# EAGLE board tenacitas (EAGLE 7.2.0)
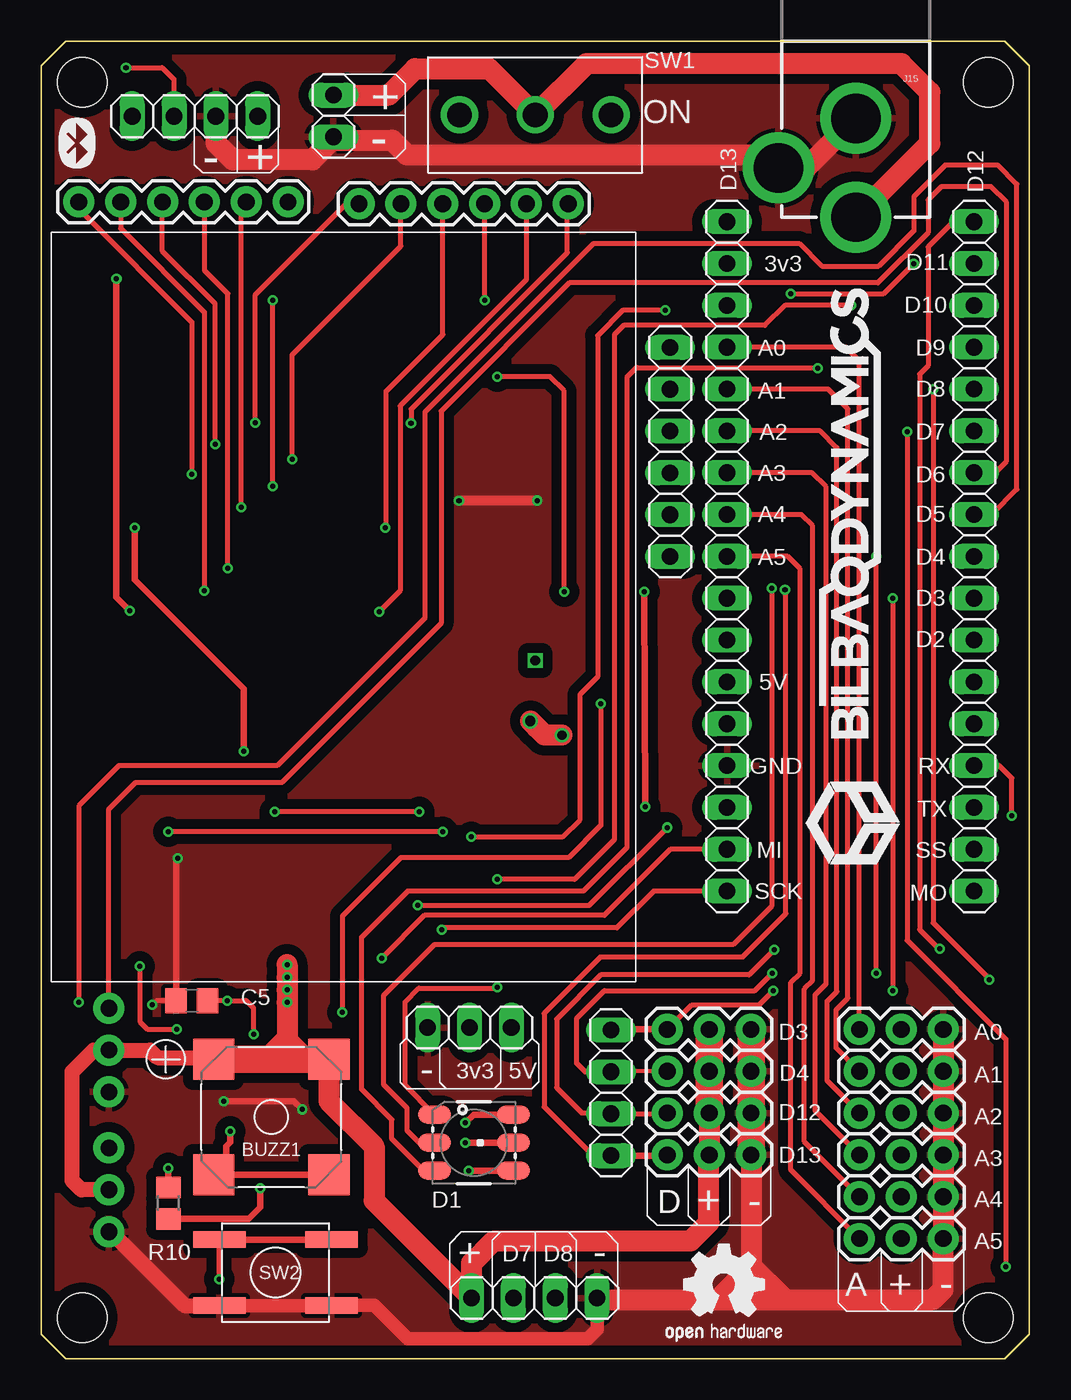
[diagram p0: board, top side]
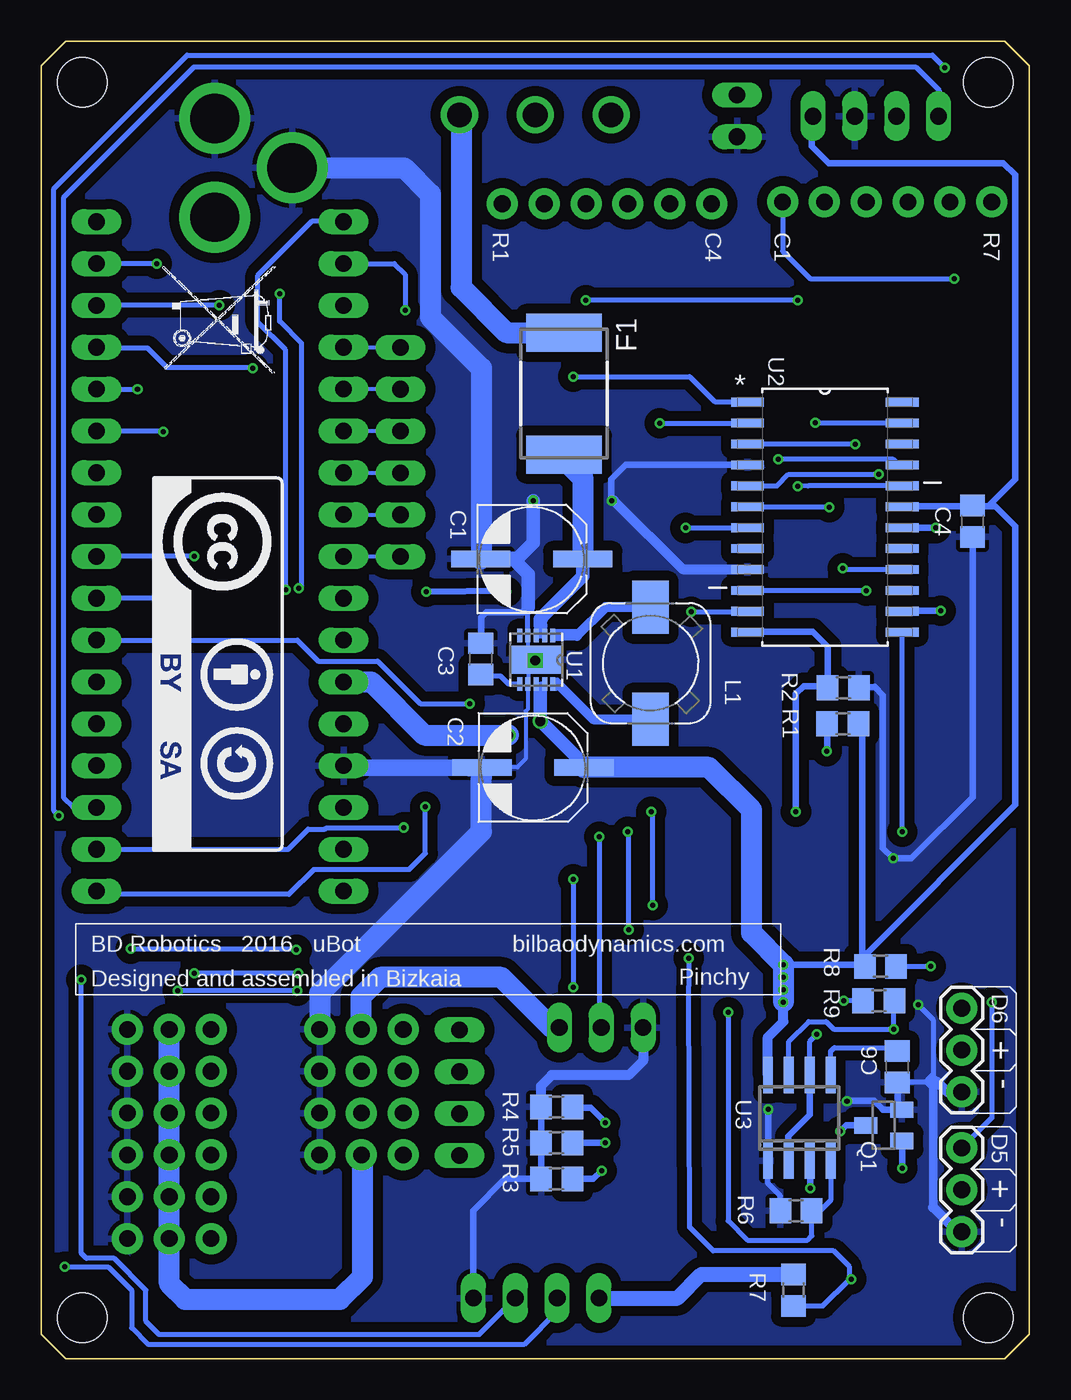
[diagram p1: board, bottom side, seen from below]

Size 60 x 80 mm. Coordinates in mm from the lower left corner, seen from the top.
Outline: 58.5,0 1.5,0 0,1.5 0,78.5 1.5,80 58.5,80 60,78.5 60,1.5 58.5,0
Copper layers (1*16): Top 0.035mm / dielectric 1.5mm / Bottom 0.035mm
Design rules "EagleRules": minimum track width 7mil, minimum drill 12mil, track to track 7mil, track to pad 7mil, pad to pad 7mil, via to via 7mil, smd to smd 0mil, copper to edge 20mil, drill to drill 10mil, minimum pad ring 10mil, minimum via ring 6mil, stop-mask expansion 2mil, vias tented up to drill 25mil, thermal gap 10mil
Holes 3 mm at 2.5,2.5 2.5,77.5 57.5,77.5 57.5,2.5

## Footprints (pad centres in the part's own frame; a part is rotated, then mirrored left to right if it is on the bottom)
KSSG74B16 = smd 2.5 x 2.5: P$1 3.5,3.5; P$2 3.5,-3.5; P$3 -3.5,-3.5; P$4 -3.5,3.5
EDK107M016A9G = smd 3.6 x 1: 1 3.1,0; 2 -3.1,0
C0805 = smd 1.3 x 1.5: 1 -0.95,0; 2 0.95,0
LED-TRICOLOR-5050 = smd 2 x 1.1: 1 -2.4,1.7; 2 -2.4,0; 3 -2.4,-1.7; 4 2.4,-1.7; 5 2.4,0; 6 2.4,1.7
SMD050F = smd 2.3 x 4.6: 1 -3.7,0; 2 3.7,0
1X03 = drill 1.016 pad 1.88: 1 0,0; 2 2.54,0; 3 5.08,0
1X04 = drill 1.016 long: 1 -3.81,0; 2 -1.27,0; 3 1.27,0; 4 3.81,0
POWER_JACK_PTH = drill 2.997 pad 4.318: GND 0,7.7; GNDBREAK 4.7,10.7; PWR 0,13.7
1X06 = drill 1.016 pad 1.88: 1 0,0; 2 2.54,0; 3 5.08,0; 4 7.62,0; 5 10.16,0; 6 12.7,0
1X06' = drill 1.016 long: 1 -6.35,0; 2 -3.81,0; 3 -1.27,0; 4 1.27,0; 5 3.81,0; 6 6.35,0
1X03' = drill 1.016 long: 1 -2.54,0; 2 0,0; 3 2.54,0
1X17 = drill 1.016 long: 1 -20.32,0; 2 -17.78,0; 3 -15.24,0; 4 -12.7,0; 5 -10.16,0; 6 -7.62,0; 7 -5.08,0; 8 -2.54,0; 9 0,0; 10 2.54,0; 11 5.08,0; 12 7.62,0; 13 10.16,0; 14 12.7,0; 15 15.24,0; 16 17.78,0; 17 20.32,0
1X02 = drill 1.016 long: 1 -1.27,0; 2 1.27,0
MCSDRH73B = smd 3.2 x 2.2: 1 -3.4,0; 2 3.4,0
SOT23 = smd 1 x 1.4: 1 -0.95,-1.1; 2 0.95,-1.1; 3 0,1.1
R0805 = smd 1.3 x 1.5: 1 -0.95,0; 2 0.95,0
MFP106D = drill 1.5: 1 -4.6,0; 2 4.6,0; COM 0,0
JAEGGER_MKII_EVQQ2 = smd 3.2 x 1: P$1 -3.4,2; P$2 -3.4,-2; P$3 3.4,-2; P$4 3.4,2
SON50P300X300X80-11N = smd 0.813 x 0.305: 1 -1.473,0.991; 2 -1.473,0.508; 3 -1.473,0; 4 -1.473,-0.508; 5 -1.473,-0.991; 6 1.473,-0.991; 7 1.473,-0.508; 8 1.473,0; 9 1.473,0.508; 10 1.473,0.991 | smd 1.702 x 3.15: 11 0,0
SOIC127P1032X265-24N = smd 1.981 x 0.533: 1 -4.699,6.985; 2 -4.699,5.715; 3 -4.699,4.445; 4 -4.699,3.175; 5 -4.699,1.905; 6 -4.699,0.635; 7 -4.699,-0.635; 8 -4.699,-1.905; 9 -4.699,-3.175; 10 -4.699,-4.445; 11 -4.699,-5.715; 12 -4.699,-6.985; 13 4.699,-6.985; 14 4.699,-5.715; 15 4.699,-4.445; 16 4.699,-3.175; 17 4.699,-1.905; 18 4.699,-0.635; 19 4.699,0.635; 20 4.699,1.905; 21 4.699,3.175; 22 4.699,4.445; 23 4.699,5.715; 24 4.699,6.985
SO08 = smd 0.6 x 2.2: 1 -1.905,-2.6; 2 -0.635,-2.6; 3 0.635,-2.6; 4 1.905,-2.6; 5 1.905,2.6; 6 0.635,2.6; 7 -0.635,2.6; 8 -1.905,2.6

## Placement (x,y rotation side)
BUZZ1  KSSG74B16  [KSSG74B16]  13.97,14.68 180 top
C1  100uF  [EDK107M016A9G]  30.22,48.56 0 bottom
C2  100uF  [EDK107M016A9G]  30.14,35.9 0 bottom
C3  0.1uF  [C0805]  33.31,42.5 90 bottom
C4  0.1uF  [C0805]  3.45,50.85 270 bottom
C5  220nF  [C0805]  9.14,21.74 180 top
C6  0.1uF  [C0805]  8.03,17.73 270 bottom
D1  LED-TRICOLOR-5050NO_IC  [LED-TRICOLOR-5050]  26.27,13.12 0 top
F1  SMD260F  [SMD050F]  28.25,58.6 270 bottom
J1  Tenacita  [1X03]  38.02,20 0 top
J2  OptoreflectorA  [1X03]  38.02,17.46 0 top
J3  ServoA  [1X03]  4.11,12.8 270 bottom
J4  ServoB  [1X03]  4.11,21.29 270 bottom
J5  OptoreflectorB  [1X03]  38.02,14.92 0 top
J6  D13  [1X03]  38.02,12.38 0 top
J7  AN0  [1X03]  49.68,20 0 top
J8  AN1  [1X03]  49.68,17.46 0 top
J9  AN2  [1X03]  49.68,14.92 0 top
J10  AN3  [1X03]  49.68,12.38 0 top
J11  AN4  [1X03]  49.68,9.84 0 top
J12  AN5  [1X03]  49.68,7.3 0 top
J13  [1X04]  34.59,16.15 270 top
J15  POWER_JACKPTH  [POWER_JACK_PTH]  49.46,83.01 180 top
J16  [1X06]  32,70.12 180 top
J17  [1X06]  14.99,70.24 180 top
J19  Utrasonic  [1X04]  29.94,3.69 0 top
J20  Analogicas  [1X06']  38.18,55.06 90 top
J21  Bluetooth  [1X04]  9.34,75.45 180 top
J22  Alimentacion  [1X03']  26,20.11 180 top
J23  [1X17]  56.64,48.72 90 top
J24  [1X17]  41.64,48.72 90 top
J25  [1X02]  17.75,75.46 270 top
L1  1uH  [MCSDRH73B]  23,42.24 90 bottom
Q1  BC847  [SOT23]  8.84,14.17 90 bottom
R1  62k  [R0805]  11.33,38.56 0 bottom
R2  10k  [R0805]  11.3,40.74 180 bottom
R3  330  [R0805]  28.7,10.92 0 bottom
R4  330  [R0805]  28.7,15.29 0 bottom
R5  330  [R0805]  28.7,13.11 0 bottom
R6  10k  [R0805]  14.17,8.99 180 bottom
R7  10k  [R0805]  14.33,4.17 90 bottom
R8  820  [R0805]  9.04,23.82 180 bottom
R9  750  [R0805]  9.14,21.74 0 bottom
R10  1k  [R0805]  7.72,9.45 270 top
SW1  MFP106D  [MFP106D]  30,75.53 0 top
SW2  EVQQ2  [JAEGGER_MKII_EVQQ2]  14.22,5.23 0 top
U1  TPS63061DSCT  [SON50P300X300X80-11N]  29.94,42.44 270 bottom
U2  MAX7219CWG+  [SOIC127P1032X265-24N]  12.42,51.1 0 bottom
U3  LM555D  [SO08]  13.97,14.63 0 bottom

## Library data of the parts
BUZZ1 SW1 SW2 = mk2
C1 C2 L1 = Jaegger_MKII
C3-C6 R1-R10 = rcl
D1 = SparkFun-LED
F1 = switch-raychem
J1-J12 = SparkFun-Connectors
J13 J19-J25 = pinhead
J15 = SparkFun-Connectors; PROD_ID: CONN-08197
J16 J17 = SparkFun-Connectors; PROD_ID: CONN-08437
Q1 = transistor
U1 = Jaegger_MKII; MPN: TPS63061DSCT; OC_FARNELL: 2078527; OC_NEWARK: 82T9734; PACKAGE: SON- 10; SUPPLIER: TEXAS INSTRUMENTS
U2 = maxim7219; MPN: MAX7219CWG+; OC_FARNELL: 9726357; OC_NEWARK: 67K6644; PACKAGE: SOIC-24; SUPPLIER: Maxim
U3 = linear

## Nets
3.3V: J22.2 J24.16
+5V: BUZZ1.P$2 BUZZ1.P$3 C2.1 C4.1 J1.2 J2.2 J3.2 J4.2 J5.2 J6.2 J7.2 J8.2 J9.2 J10.2 J11.2 J12.2 J19.1 J21.1 J22.1 J24.6 R1.2 R7.2 R8.2 U1.8 U1.9 U2.19 U3.8
A0: J7.1 J20.6 J24.14
A1: J8.1 J20.5 J24.13
A2: J9.1 J20.4 J24.12
A3: J10.1 J20.3 J24.11
A4: J11.1 J20.2 J24.10
A5: J12.1 J20.1 J24.9
C1: J17.1 U2.14
C2: J17.3 U2.16
C3: J16.3 U2.20
C4: J16.6 U2.23
C5: J16.5 U2.21
D0/RX: J21.3 J23.4
D1/TX: J21.4 J23.3
D2: J23.7 R6.1 U3.4
D3: J1.1 J13.1 J23.8
D4: J2.1 J13.2 J23.9
D5: J3.1 J23.10
D6: J4.1 J23.11
D7: J19.2 J23.12
D8: J19.3 J23.13
D9: D1.3 J23.14
D10: D1.1 J23.15
D11: D1.2 J23.16
D12: J5.1 J13.3 J23.17
D13: J6.1 J13.4 J24.17
D14: J24.2 R7.1 SW2.P$1 SW2.P$4
D15/SCK: J24.1 U2.13
D16/MOSI: J23.1 U2.1
D17/SS: J23.2 R2.2 U2.12
GND: C1.2 C2.2 C3.2 C4.2 C5.2 C6.2 J1.3 J2.3 J3.3 J4.3 J5.3 J6.3 J7.3 J8.3 J9.3 J10.3 J11.3 J12.3 J15.GND J15.GNDBREAK J19.4 J21.2 J22.3 J24.4 J25.2 Q1.2 R2.1 R3.1 R4.1 R5.1 R6.2 SW2.P$2 SW2.P$3 U1.4 U1.7 U1.11 U2.4 U2.9 U3.1
N$1: R8.1 R9.2 U3.7
N$2: R10.2 U3.3
N$3: D1.4 R3.2
N$4: D1.6 R4.2
N$5: C3.1 U1.6
N$6: D1.5 R5.2
N$8: L1.2 U1.1
N$9: L1.1 U1.10
N$10: BUZZ1.P$1 BUZZ1.P$4 Q1.3
N$11: C5.1 R9.1 U3.2 U3.6
N$12: F1.1 SW1.2
N$13: C6.1 U3.5
N$15: Q1.1 R10.1
N$22: R1.1 U2.18
N$23: J15.PWR J25.1 SW1.COM
R1: J16.1 U2.2
R2: J16.2 U2.11
R3: J17.2 U2.6
R4: J16.4 U2.7
R5: J17.4 U2.3
R6: J17.5 U2.10
R7: J17.6 U2.5
VCC: C1.1 F1.2 U1.2 U1.3

## Tracks (layer width: path | path; a pad name or v marks a point on that pad's centre or on a via)
3.3V  (via drill 0.3 pad 0.61)
  Top 0.305: v37.9,63.65 35.31,63.65 33.78,62.13 33.78,41.4 32.72,40.34 32.72,32.74 31.67,31.7 v26.11,31.7
  Bottom 0.305: J24.16 38.56,66.5 37.9,65.84 v37.9,63.65 | v26.11,31.7 26.11,20.22 J22.2
+5V  (via drill 0.3 pad 0.61, 0.56 pad 0.81, 0.61 pad 0.91)
  Top 0.914: J3.2 2.44,10.26 1.88,10.82 1.88,17.43 3.19,18.75 J4.2 6.6,18.75 7.06,18.29 10.36,18.29 BUZZ1.P$2
  Top 1.27: 14.89,19.4 14.89,19.41 13.97,18.49 | 14.89,19.4 14.89,18.23 14.94,18.18 | 14.89,19.4 15.7,18.59 | BUZZ1.P$3 17.47,15.65 20.22,12.9 20.22,9.6 J19.1 26.13,5.81 27.48,7.16 39.43,7.16 40.55,8.27 40.55,12.37 J6.2 J5.2 | v14.94,23.93 v14.94,23.16 v14.94,22.4 v14.94,21.64 14.94,19.45 14.89,19.4 | v31.62,37.86 30.57,37.86 30.09,38.34 v29.7,38.73
  Top 1.676: BUZZ1.P$2 14.94,18.18 BUZZ1.P$3 | J1.2 J2.2 J5.2
  Bottom 0.254: 29.41,40.94 U1.9
  Bottom 0.305: 29.69,40.45 29.69,40.71 | 29.69,40.71 U1.8 29.65,40.96 29.57,40.88 | 29.69,40.71 U1.9
  Bottom 0.406: v14.94,23.93 10.16,23.93 | R8.2 9.99,23.93 10.16,23.93 | 10.16,23.93 10.16,24.33 | 10.16,24.33 10.16,38.34 R1.2 | U2.19 7.69,51.77 4.94,51.77 C4.1 4.81,51.77 2.49,51.77 | 2.49,51.77 0.86,53.39 0.86,71.88 1.57,72.59 12.19,72.59 13.21,73.61 13.21,75.38 J21.1 | 2.49,51.77 2.08,51.77 0.86,50.55 0.86,33.63 10.16,24.33
  Bottom 0.61: U3.8 15.88,19.53 14.94,20.47 v14.94,21.64
  Bottom 0.813: 29.69,40.45 29.7,40.44 v29.7,38.73 27.04,36.06 C2.1
  Bottom 0.914: J19.1 21.35,3.69 19.91,5.13 R7.2
  Bottom 1.27: R7.2 | 14.94,21.69 v14.94,22.4 v14.94,23.16 v14.94,23.93 16.87,25.86 16.87,33.33 19.46,35.92 27.02,35.92 C2.1 | J22.1 29,20.11 32.05,23.16 39.42,23.16 40.59,22 40.59,20.03 J1.2 | J7.2 J8.2 J9.2 J10.2 J11.2 J12.2 52.22,4.57 51.26,3.61 41.86,3.61 40.49,4.98 40.49,12.31 J6.2 | J24.6 39.97,41.1 36.74,37.86 v31.62,37.86
A0
  Top 0.305: J7.1 49.68,60.59 48.85,61.42 J24.14
  Bottom 0.254: J24.14 38.19,61.42 J20.6
A1
  Top 0.305: J8.1 48.26,18.88 48.26,21.18 48.97,21.89 48.97,57.68 47.77,58.88 J24.13
  Bottom 0.254: J20.5 41.63,58.87 J24.13
A2
  Top 0.305: J9.1 47.7,16.9 47.7,21.69 48.31,22.3 48.31,55.32 47.3,56.34 J24.12
  Bottom 0.254: J24.12 38.19,56.34 J20.4
A3
  Top 0.305: J10.1 46.99,15.07 46.99,22.1 47.65,22.76 47.65,52.93 46.78,53.8 J24.11
  Bottom 0.254: J24.11 38.19,53.8 J20.3
A4
  Top 0.305: J11.1 46.33,13.19 46.33,22.45 46.84,22.96 46.84,50.58 46.16,51.26 J24.10
  Bottom 0.254: J24.10 39.12,51.26 38.19,51.26 J20.2
A5
  Top 0.305: J12.1 45.52,11.47 45.52,22.86 46.08,23.42 46.08,47.97 45.33,48.72 J24.9
  Bottom 0.254: J24.9 38.19,48.72 J20.1
C1  (via drill 0.3 pad 0.61)
  Top 0.406: v4.57,65.58 4.57,46.23 v5.38,45.41
  Bottom 0.305: J17.1 14.99,67.26 13.31,65.58 v4.57,65.58 | U2.14 6.79,45.38
  Bottom 0.406: v5.38,45.41 6.76,45.41 6.79,45.38
C2  (via drill 0.3 pad 0.61)
  Top 0.305: v11.33,48.01 11.33,64.67 9.91,66.09 J17.3
  Bottom 0.305: U2.16 11.14,47.92 v11.33,48.01
C3  (via drill 0.3 pad 0.61)
  Top 0.305: v14.07,52.98 v14.07,64.26 | v26.92,64.26 J16.3
  Bottom 0.305: U2.20 13.43,53 v14.07,52.98 | v14.07,64.26 v26.92,64.26
C4  (via drill 0.3 pad 0.61)
  Top 0.305: J16.6 18.51,70.12 13.01,64.62 v13.01,56.84
  Bottom 0.305: 12.8,56.9 v13.01,56.84 12.87,56.81 U2.23
C5  (via drill 0.3 pad 0.61)
  Top 0.305: v15.24,54.61 15.24,60.96 21.84,67.56 J16.5
  Bottom 0.305: U2.21 7.94,54.27 8.28,54.61 v15.24,54.61
D0/RX  (via drill 0.3 pad 0.61)
  Top 0.305: v58.93,32.97 58.93,35.26 58.17,36.02 J23.4 | v5.15,78.4 7.35,78.4 8.05,77.7 8.05,75.46 J21.3
  Bottom 0.305: v58.93,32.97 59.23,33.27 59.23,71.06 51.14,79.15 5.9,79.15 v5.15,78.4
D1/TX
  Bottom 0.305: J23.3 58.06,33.48 58.62,34.04 58.62,70.53 50.72,78.44 6.91,78.44 5.49,77.01 5.49,75.48 J21.4
D2  (via drill 0.3 pad 0.61)
  Top 0.305: v18.29,21.03 18.29,24.84 18.29,25.36 18.29,26.87 21.84,30.43 32.03,30.43 33.98,32.38 v33.98,39.78
  Bottom 0.305: U3.4 12.06,9.63 12.7,8.99 R6.1 13.21,8.98 13.21,7.47 13.46,7.21 17.12,7.21 18.29,8.38 v18.29,21.03 | J23.7 44.45,43.64 43.18,42.37 39.57,42.37 36.98,39.78 v33.98,39.78
D3  (via drill 0.3 pad 0.61)
  Top 0.305: J1.1 39.51,21.49 43.59,21.49 v44.45,22.35 | v51.71,46.18 v51.71,22.35
  Top 0.406: J1.1 34.63,20 J13.1
  Bottom 0.305: v44.45,22.35 v51.71,22.35 | v51.71,46.18 J23.8
D4  (via drill 0.3 pad 0.61)
  Top 0.254: J2.1 34.63,17.46 J13.2
  Top 0.305: J13.2 33.02,17.42 32.51,17.93 32.51,20.68 34.19,22.35 43.33,22.35 v44.4,23.42 | v50.7,23.42 v50.7,48.72
  Bottom 0.305: v44.4,23.42 v50.7,23.42 | v50.7,48.72 J23.9
D5  (via drill 0.3 pad 0.61)
  Top 0.305: J23.10 56.69,51.31 57.76,51.31 59.23,52.78 59.23,71.32 58.06,72.49 54.91,72.49 52.98,70.56 52.98,68.48 50.85,66.34 47.4,66.34 46.02,67.72 33.55,67.72 23.32,57.49 23.32,45.01 14.33,36.02 4.72,36.02 2.29,33.58 v2.29,21.64
  Bottom 0.305: J3.1 2.29,14.63 v2.29,21.64
D6
  Top 0.305: J23.11 57.91,53.8 58.62,54.51 58.62,70.21 57.66,71.17 54.66,71.17 53.85,70.36 53.85,68.38 50.8,65.33 32.07,65.33 24.28,57.54 24.28,44.65 14.63,35 5.74,35 4.12,33.38 J4.1
D7  (via drill 0.3 pad 0.61)
  Top 0.305: v52.58,56.29 52.58,25.4 58.57,19.41 v58.57,5.59
  Bottom 0.305: J23.12 52.73,56.34 v52.58,56.29 | J19.2 28.67,2.87 30.68,0.86 53.49,0.86 54.51,1.88 54.51,4.17 55.93,5.59 v58.57,5.59
D8  (via drill 0.3 pad 0.61)
  Top 0.305: v54.15,58.88 54.15,26.47 57.56,23.06 v57.56,23.01
  Bottom 0.305: J19.3 33.43,1.47 52.83,1.47 53.65,2.29 53.65,4.17 55.58,6.1 57.25,6.1 57.56,6.4 v57.56,23.01 | J23.13 v54.15,58.88 54.05,58.98
D9  (via drill 0.3 pad 0.61)
  Top 0.305: D1.3 23.23,11.42 21.29,13.36 21.29,14.53 19.46,16.36 19.46,25.6 22.25,28.4 32.92,28.4 35.56,31.04 35.56,59.59 36.17,60.2 36.22,60.15 v47.14,60.15
  Bottom 0.305: J23.14 56.59,61.37 53.54,61.37 52.38,60.2 47.19,60.2 v47.14,60.15
D10  (via drill 0.3 pad 0.61)
  Top 0.305: D1.1 22.1,16.59 22.1,21.66 22.94,22.5 27.64,22.5 27.64,22.45 v27.69,22.55 | v49.17,63.96 45.16,63.96 43.94,62.74 35.36,62.74 34.8,62.18 34.8,31.52 32.39,29.11 v27.69,29.11
  Bottom 0.305: v27.69,29.11 v27.69,22.55 | v49.17,63.96 J23.15
D11  (via drill 0.3 pad 0.61)
  Top 0.305: v44.35,46.79 44.35,27.48 42.01,25.15 23.88,25.15 20.78,22.05 20.78,16.66 22.2,15.24 22.2,13.87 23.01,13.06 23.81,13.06 D1.2 | v45.52,64.67 51.16,64.67 v52.98,66.5
  Bottom 0.305: v44.35,46.79 44.2,46.94 44.2,61.67 45.52,62.99 v45.52,64.67 | v52.98,66.5 J23.16
D12  (via drill 0.3 pad 0.61)
  Top 0.305: v44.5,24.84 42.98,23.32 33.99,23.32 31.29,20.62 31.29,16.46 32.82,14.94 34.54,14.94 J13.3 37.98,14.88 J5.1 | J23.17 55.37,69.04 53.85,67.51 53.85,60.3 53.34,59.79 53.34,26.06 54.51,24.89 v54.56,24.89
  Top 0.406: 38.02,14.94 J5.1
  Bottom 0.305: v54.56,24.89 44.55,24.89 v44.5,24.84
D13  (via drill 0.3 pad 0.61)
  Top 0.305: v45.16,46.69 45.21,46.63 45.21,27.03 42.57,24.38 33.93,24.38 30.53,20.98 30.53,15.29 33.33,12.5
  Top 0.406: 33.33,12.5 33.47,12.36 34.58,12.36 J13.4 37.98,12.34 J6.1
  Bottom 0.305: v45.16,46.69 45.16,61.27 46.84,62.94 46.84,65.79 43.54,69.09 41.69,69.09 J24.17
D14  (via drill 0.3 pad 0.61)
  Top 0.305: v10.82,4.84 SW2.P$1 | J24.2 38.2,30.94 34.19,26.92 23.27,26.92 v20.68,24.33
  Top 0.406: SW2.P$4 SW2.P$1
  Bottom 0.305: R7.1 12.53,3.22 10.92,4.83 | 10.92,4.83 v10.82,4.84 | 10.92,4.83 10.92,5.59 11.89,6.55 19.2,6.55 20.62,7.98 20.68,22.66 v20.68,24.33
D15/SCK  (via drill 0.3 pad 0.61)
  Top 0.305: J24.1 37.19,28.4 34.95,26.16 24.43,26.16 v24.33,26.06 | v24.38,32 v7.72,32
  Bottom 0.305: v24.33,26.06 24.33,31.95 v24.38,32 | v7.72,32 U2.13
D16/MOSI  (via drill 0.3 pad 0.61)
  Top 0.305: 27.64,59.64 v27.69,59.64 28.25,59.64 28.75,59.64 30.89,59.64 31.75,58.78 v31.75,46.58
  Top 0.406: v36.68,33.53 v36.63,46.58
  Bottom 0.305: v36.68,33.53 36.68,30.68 37.64,29.72 43.43,29.72 44.96,28.19 56.44,28.19 J23.1 | v27.69,59.64 20.62,59.64 19.1,58.12 17.15,58.12 U2.1
  Bottom 0.406: v36.63,46.58 31.8,46.63 v31.75,46.58
D17/SS  (via drill 0.3 pad 0.61)
  Top 0.305: 38,32.21 v38,32.26 33.27,27.53 v22.86,27.53 | v22.96,33.22 v14.17,33.22
  Bottom 0.305: J23.2 45.01,30.94 43.79,32.16 42.77,32.16 42.72,32.21 38.05,32.21 v38,32.26 | v22.86,27.53 22.86,33.12 v22.96,33.22
  Bottom 0.406: v14.17,33.22 14.17,40.39 13.72,40.84 12.25,40.84 R2.2 12.24,43.23 13.16,44.15 17.08,44.15 U2.12
GND  (via drill 0.3 pad 0.61)
  Top 0.305: C5.2 7.01,21.74 v6.76,21.49
  Top 0.406: 17,3.23 17.07,3.3 17.55,3.3 SW2.P$3 | v11.07,15.65 15.34,15.65 v15.85,15.14 | C5.2 8.19,30.29 v8.28,30.38
  Top 0.61: v30.12,52.11 v25.37,52.11
  Top 0.813: SW2.P$2 SW2.P$3 17.64,3.25 20.22,3.25 22.25,1.22 33.17,1.22 33.75,1.8 33.75,3.59 J19.4
  Top 0.914: SW2.P$2 8.71,3.23 4.22,7.72 J3.3
  Top 1.27: J15.GND 46.46,72.31 J15.GNDBREAK 44.25,72.31 43.46,73.1 22.2,73.1 21.3,74 17.75,74 J25.2 17.75,74.08 16.46,72.8 11.63,72.8 10.62,73.81 10.62,75.43 J21.2 | J7.3 J8.3 J9.3 J10.3 J11.3 J12.3 54.77,4.21 54.14,3.59 41.06,3.59 | 33.75,3.59 41.06,3.59 | 41.06,3.59 43.12,5.64 | 43.12,5.64 43.15,5.67 43.15,12.33 J6.3 | 43.12,5.64 43.12,5.63 44.98,3.77 43.45,3.77 43.01,4.21
  Top 1.676: J1.3 J2.3 J5.3 J6.3
  Bottom 0.254: U1.4 30.45,42.85 30.48,42.82 30.33,42.82 U1.11 30,42.44 30.43,42.01 30.43,40.98 U1.7 30.45,39.45 30.58,39.32 30.58,36.42 31.09,35.92 33.22,35.92 C2.2 33.21,35.87
  Bottom 0.305: 7.99,16.82 6.25,16.82 | 6.25,16.82 6.2,16.76 | 6.2,16.76 5.84,16.41 | 6.25,16.82 5.59,16.82 | v6.76,21.49 5.84,20.57 5.84,17.27 | 5.84,17.27 5.84,16.2 | 5.84,17.27 5.89,17.22 | 5.89,17.22 6.2,16.92 6.2,16.76 | 5.89,17.22 5.64,16.97 5.59,16.97 | R6.2 15.12,9.89 15.9,10.67 15.9,12.01 U3.1 | 33.33,43.46 C3.2 | 41.52,35.9 J24.4 | 33.27,35.31 33.27,35.86 C2.2 | U1.4 30.45,45.3 30.45,45.61 30.44,45.62
  Bottom 0.406: R4.1 R5.1 R3.1 31.85,10.92 33.78,8.99 33.75,8.99 J19.4 33.78,3.72 | C6.2 7.99,16.82 7.99,15.38 Q1.2 8.89,15.12 8.89,15.14 9.43,15.68 11.04,15.68 v11.07,15.65 | v15.85,15.14 15.85,12.06 U3.1 | 30.45,45.3 30.49,45.34 32.97,45.34 33.28,45.04 33.28,43.45 C3.2 | U2.4 24.52,54.27 25.4,53.39 25.4,52.14 v25.37,52.11 | R2.1 9.4,40.79 8.89,40.28 8.89,30.99 v8.28,30.38 7.16,30.38 3.45,34.09 C4.2
  Bottom 0.508: 5.59,16.82 5.84,16.56 5.84,16.41 5.84,16.2 5.84,9.2
  Bottom 0.61: J4.3 4.98,16.2 5.59,16.82 | J3.3 4.37,7.72 5.84,9.2 | J22.3 23.46,18.09 24.33,17.22 29.01,17.22 29.67,16.56 29.67,15.31 R4.1 | v25.37,52.11 25.23,52.11 21.06,47.94 17.14,47.94 U2.9
  Bottom 0.813: 33.27,48.6 31.41,48.6 | 31.41,48.6 31.06,48.6 30.12,49.54 v30.12,52.11 | 30.44,45.62 30.44,47.63 31.41,48.6 | C2.2
  Bottom 1.016: 41.52,35.9 34.05,35.9 34,35.85 33.29,35.85 C2.2
  Bottom 1.27: J1.3 43.1,22.18 33.27,32 33.27,35.31 | J15.GNDBREAK 37.97,72.31 36.37,70.71 36.37,63.25 33.27,60.15 33.27,48.6 C1.2
  pour Bottom (isolate 0.61): 3,79 1,77 1,2.5 2.5,1 57.5,1 59,2.5 59,77.5 57.5,79
  pour Top (isolate 0.61): 3,79 1,77 1,2.5 2.5,1 57.5,1 59,2.5 59,77.5 57.5,79
N$1  (via drill 0.3 pad 0.61)
  Top 0.305: v5.99,23.82 5.99,20.47 6.45,20.02 v8.23,20.02
  Bottom 0.305: U3.7 14.61,19.28 13.41,20.47 12.34,20.47 11.89,20.02 v8.23,20.02 8.23,21.71 R9.2 | R8.1 v5.99,23.82
N$2  (via drill 0.3 pad 0.61)
  Top 0.406: R10.2 12.61,8.5 13.31,9.2 v13.31,10.36
  Bottom 0.406: v13.31,10.36 13.31,12.01 U3.3
N$3  (via drill 0.3 pad 0.61)
  Top 0.406: v25.96,11.43 28.12,11.43 D1.4
  Bottom 0.406: R3.2 26.47,10.92 v25.96,11.43
N$4  (via drill 0.3 pad 0.61)
  Top 0.406: D1.6 26.25,14.82 v25.76,14.33
  Bottom 0.406: v25.76,14.33 25.76,14.38 26.62,15.24 27.7,15.24 R4.2
N$5
  Bottom 0.305: U1.6 31.62,40.96 32.11,41.45 33.22,41.45 C3.1
N$6  (via drill 0.3 pad 0.61)
  Top 0.406: v25.76,13.11 28.66,13.11 D1.5
  Bottom 0.406: R5.2 v25.76,13.11
N$7  (via drill 0.6)
  other vias: 30,42.4
N$8
  Bottom 0.305: 28.35,43.89 28.36,43.91 U1.1 | U1.1 28.95,44 28.79,44.16 27.4,44.16 27.38,44.15 | 28.95,43.75 28.95,43.66 | U1.1 28.95,43.75 | 28.95,43.75 28.38,43.76
  Bottom 0.61: L1.2 25.74,45.64 27.48,43.89 28.35,43.89
N$9
  Bottom 0.305: U1.10 28.93,40.95 28.6,40.95 | U1.10 28.95,40.92 28.73,40.7 | U1.10 28.77,40.96 28.59,41.14 28.66,41.21 28.79,41.21
  Bottom 0.61: 28.6,40.95 26.49,38.84 L1.1
N$10  (via drill 0.3 pad 0.61)
  Top 0.406: BUZZ1.P$1 10.97,11.18 | 10.97,11.18 BUZZ1.P$4 | v11.48,13.82 11.48,13.16 11.23,12.9 11.23,11.44 10.97,11.18
  Bottom 0.406: Q1.3 11.12,14.17 v11.48,13.82
N$11  (via drill 0.3 pad 0.61)
  Top 0.305: v12.9,19.71 12.9,21.29 12.45,21.74 v11.29,21.74 R9.1
  Bottom 0.305: U3.6 13.34,19.28 v12.9,19.71 | R9.1 v11.29,21.74
  Bottom 0.406: U3.6 13.34,14.81 14.63,13.51 14.63,12.06 U3.2
N$12
  Bottom 1.27: SW1.2 34.5,75.53 34.5,65.05 31.75,62.3 F1.1
N$13
  Bottom 0.305: U3.5 12.06,18.67 11.84,18.9 8.24,18.9 C6.1
N$15  (via drill 0.3 pad 0.61)
  Top 0.406: R10.1 v7.72,11.58
  Bottom 0.406: v7.72,11.58 arc-1 Q1.1
N$22  (via drill 0.3 pad 0.61)
  Top 0.406: v12.29,36.88 12.29,40.69 5.69,47.3 v5.69,50.44
  Bottom 0.406: R1.1 12.28,36.9 v12.29,36.88 | v5.69,50.44 7.7,50.44 U2.18
N$23
  Top 1.27: J15.PWR 53.95,73.8 53.95,76.91 52.22,78.64 33.11,78.64 SW1.COM 27.19,78.33 22.71,78.33 21.11,76.73 J25.1
R1  (via drill 0.3 pad 0.61)
  Top 0.305: v22.45,56.79 22.45,57.66 31.95,67.16 31.95,70.08 J16.1
  Bottom 0.305: v22.45,56.79 17.14,56.79 U2.2
R2  (via drill 0.3 pad 0.61)
  Top 0.305: v20.52,45.36 21.79,46.63 21.79,57.86 29.46,65.53 J16.2
  Bottom 0.305: v20.52,45.36 17.14,45.36 U2.11
R3  (via drill 0.3 pad 0.61)
  Top 0.305: v12.14,51.71 12.14,69.99 J17.2
  Bottom 0.305: U2.6 12.11,51.73 v12.14,51.71
R4  (via drill 0.3 pad 0.61)
  Top 0.305: v20.88,50.44 20.93,50.49 20.93,58.73 24.38,62.18 J16.4
  Bottom 0.305: v20.88,50.44 17.14,50.44 U2.7
R5  (via drill 0.3 pad 0.61)
  Top 0.305: J17.4 7.37,67.26 10.57,64.06 v10.57,55.52
  Bottom 0.305: v10.57,55.52 17.1,55.52 U2.3
R6  (via drill 0.3 pad 0.61)
  Top 0.305: J17.5 4.83,68.63 9.91,63.55 v9.91,46.63
  Bottom 0.305: v9.91,46.63 17.1,46.63 U2.10
R7  (via drill 0.3 pad 0.61)
  Top 0.305: J17.6 2.54,69.99 2.54,69.55 9.14,62.94 v9.14,53.7
  Bottom 0.305: U2.5 15.32,53 14.63,53.7 v9.14,53.7
VCC
  Bottom 0.305: U1.3 U1.2 29.68,44.15 29.68,44.52
  Bottom 0.813: C1.1 27.12,47.5 29.59,45.02 29.59,45.01 29.65,44.95 29.65,44.94 29.69,44.9 29.69,44.54 29.68,44.52
  Bottom 1.27: C1.1 27.12,53.45 28.25,54.58 F1.2

## Text on the board
bPlace: bilbaodynamics.com | BD Robotics 2016 uBot | Pinchy | Designed and assembled in Bizkaia | D6 | + | - | D5 | + | -
tNames: + | - | ON | - | + | D13 | D12 | 3v3 | D11 | D10 | A0 | D9 | A1 | D8 | A2 | D7 | A3 | D6 | A4 | D5 | A5 | D4 | D3 | D2 | 5V | GND | RX | TX | MI | SS | SCK | MO | D3 | A0 | - | 3v3 | 5V | D4 | A1 | D12 | A2 | D13 | A3 | D | + | - | A4 | A5 | + | D7 | D8 | - | A | + | -
bNames: R7 | C1 | C4 | R1